# Altium PCB wifi_car.PcbDoc (part 1 of 5)
Units mm, origin at the board's own origin, x right, y up, seen from the top; angles counter-clockwise.
Board outline 68.55 x 80.89 mm, 2 copper layers (Top Layer, Bottom Layer); 133 components, 98 nets, 473 pads, 106 vias.
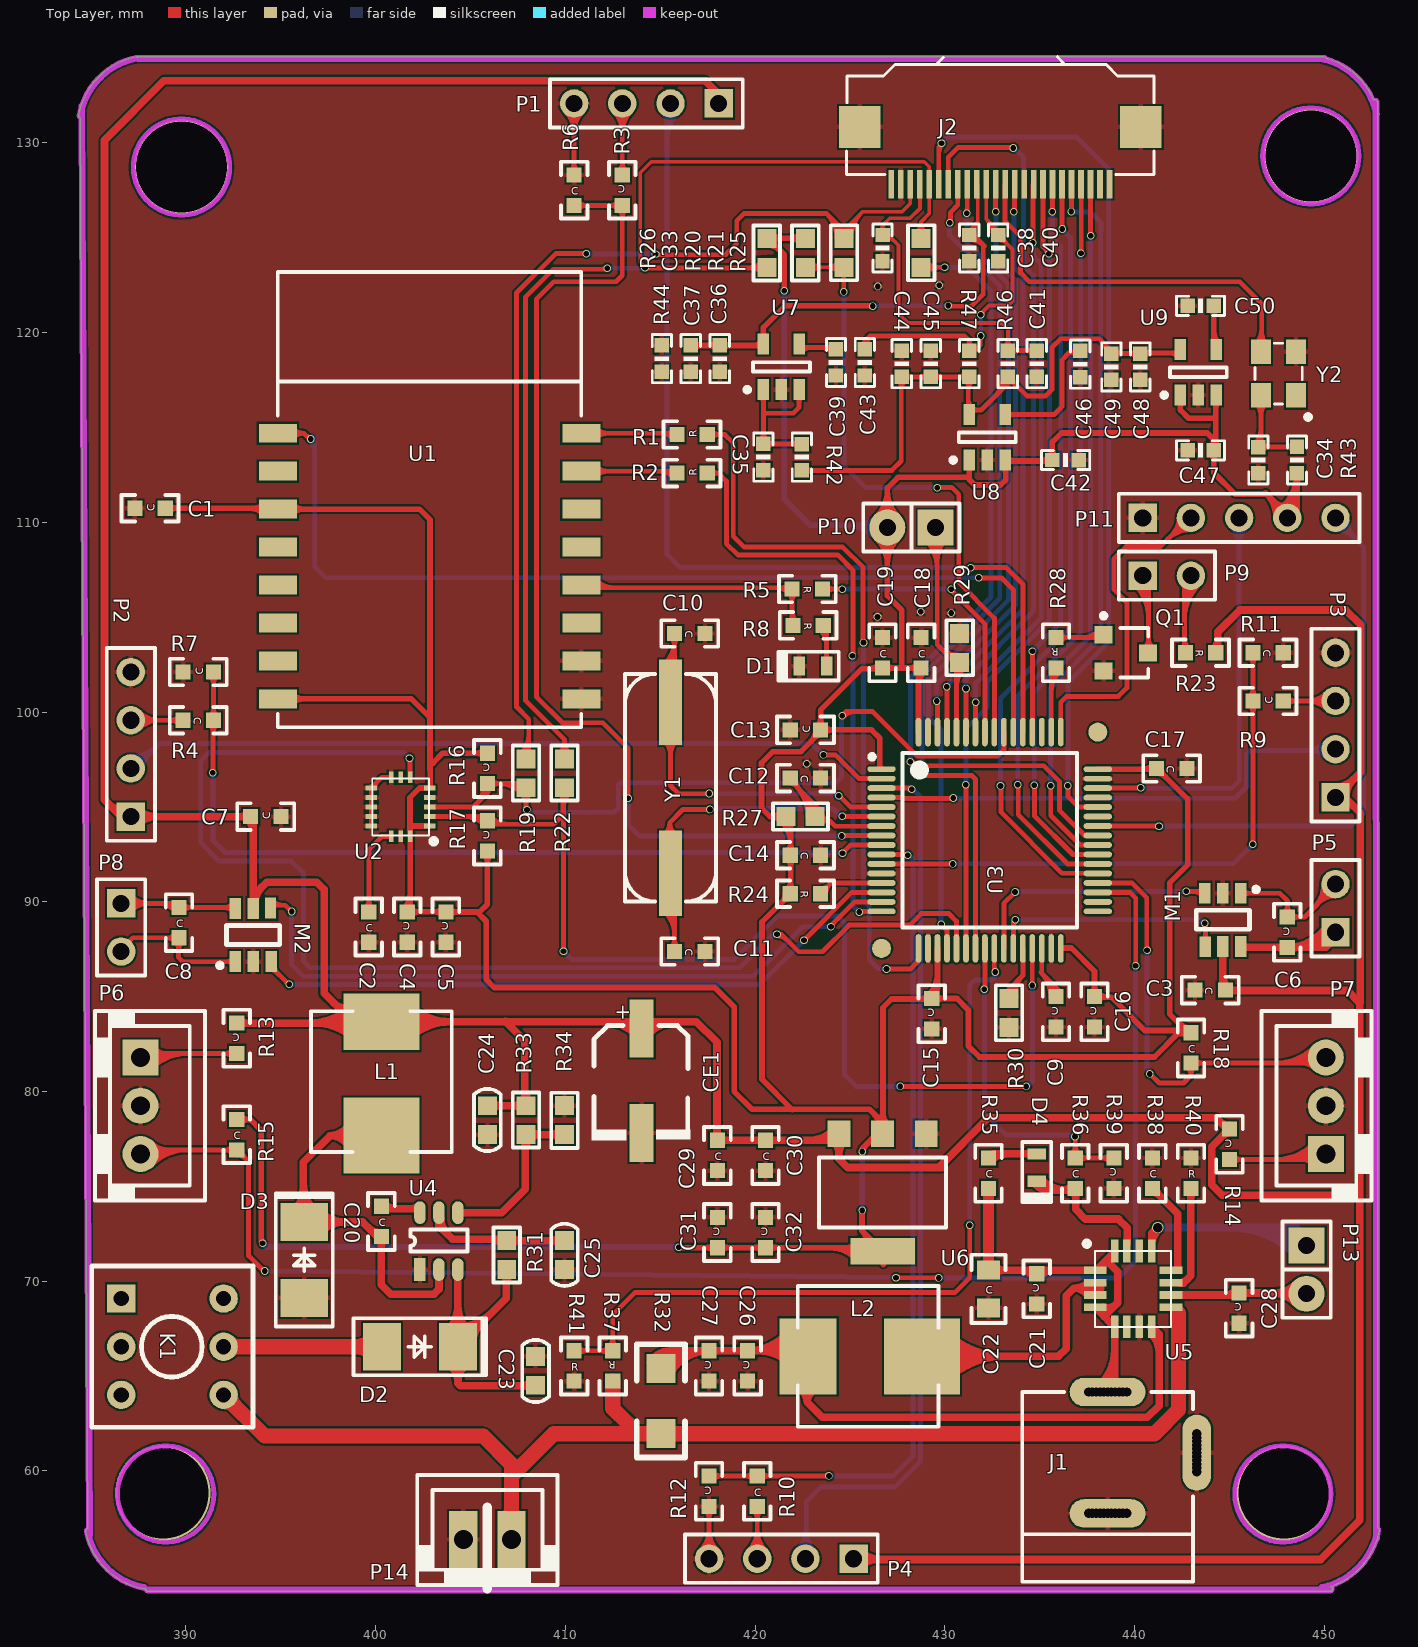
[diagram p0: Top Layer view]
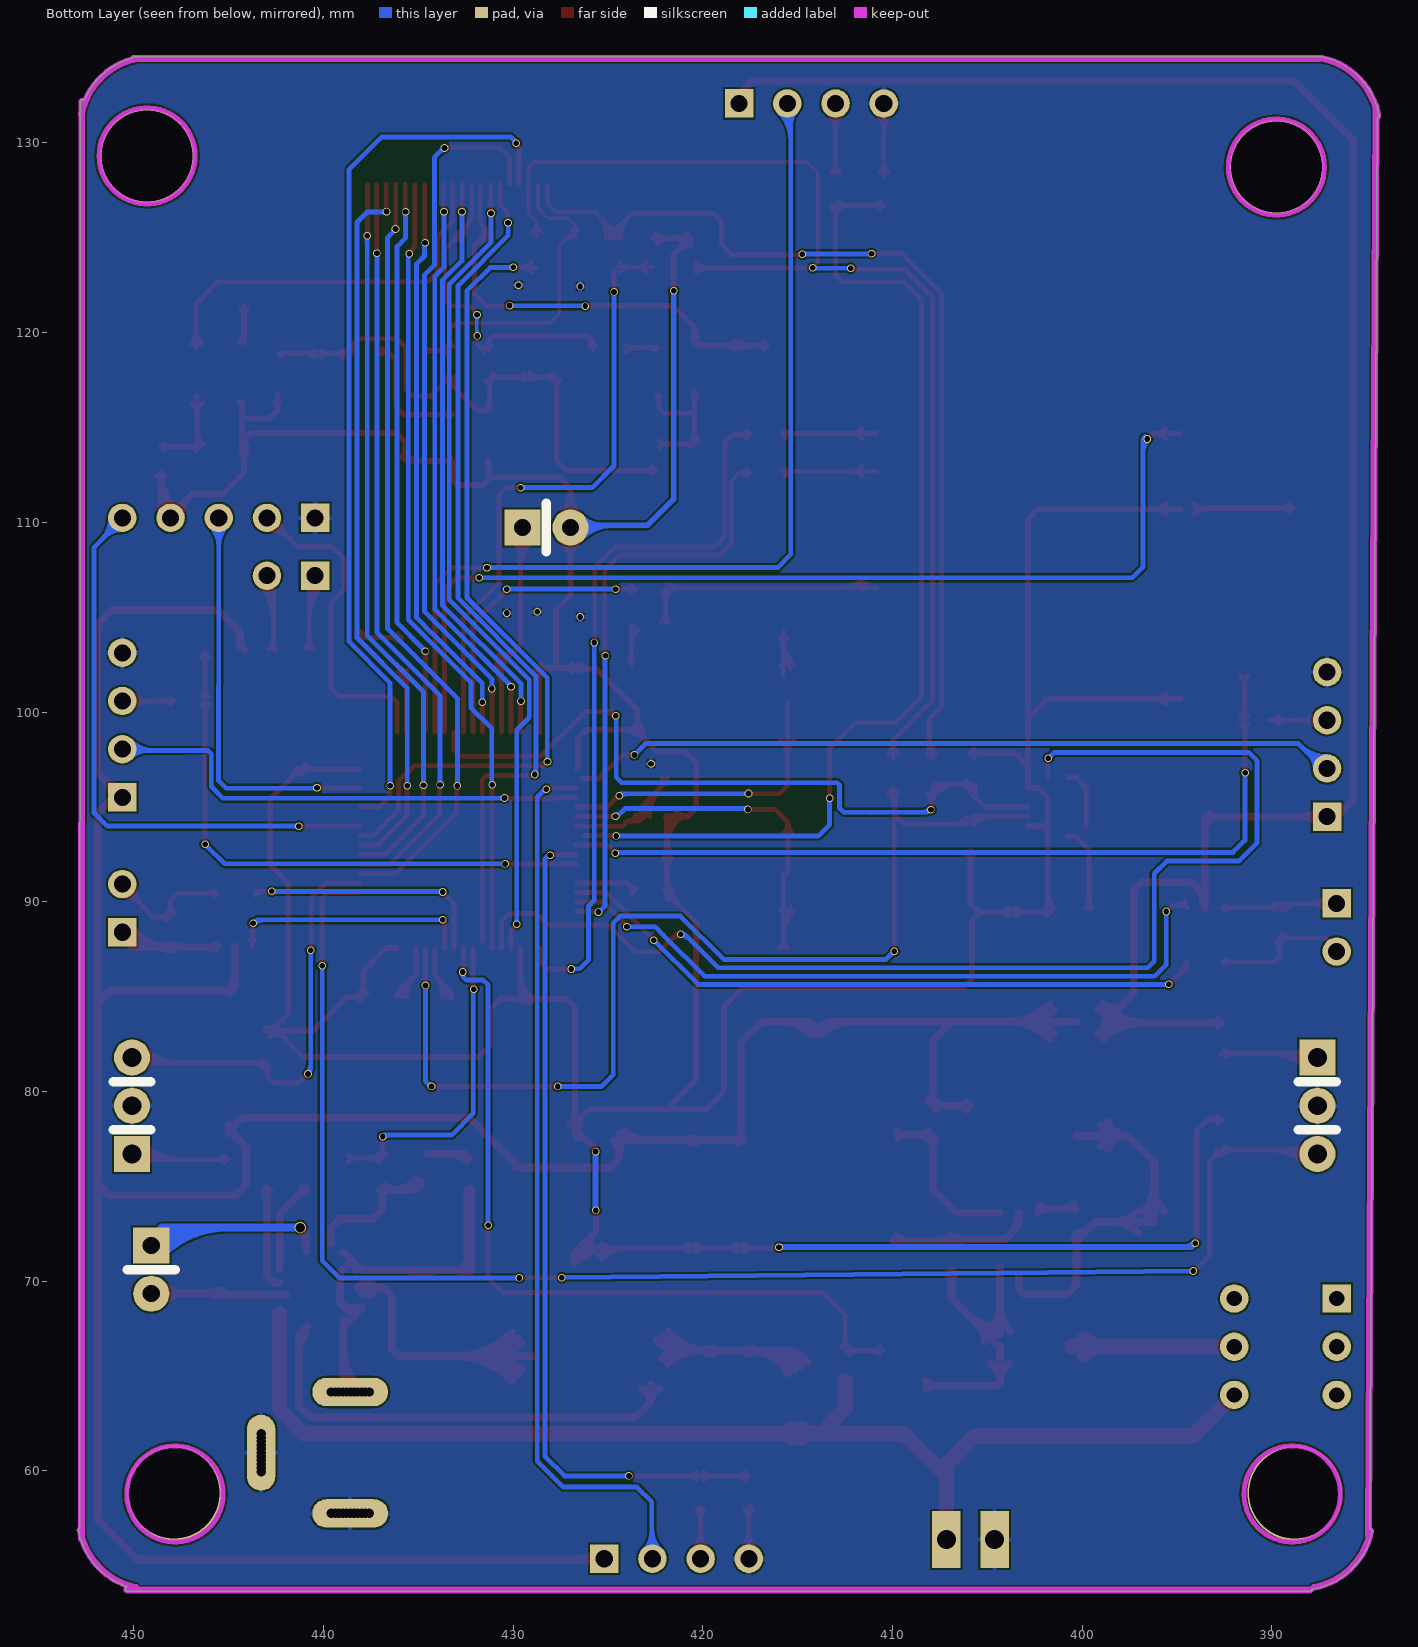
[diagram p1: Bottom Layer view, seen from below]

## Layer stack, top to bottom
Top Layer: signal copper 0.0356
Dielectric: dielectric 0.32, FR-4, Dk 4.8
Bottom Layer: signal copper 0.0356

## Board outline
384.839,56.947 384.442,131.312 cw(c384.474,131.435) 384.349,131.458 cw(c388.115,130.784) 384.439,131.845 384.439,131.909 cw(c384.566,131.91) 384.492,132.014 cw(c388.115,130.784) 387.365,134.536 cw(c387.39,134.411) 387.443,134.526 cw(c387.48,134.405) 387.48,134.532 449.674,134.532 cw(c449.73,134.418) 449.752,134.543 cw(c449.079,130.777) 449.811,134.532 449.988,134.532 cw(c449.988,134.405) 450.101,134.464 cw(c449.079,130.777) 452.61,132.249 cw(c452.684,132.145) 452.811,132.145 452.811,131.618 cw(c449.079,130.777) 452.83,131.527 cw(c452.705,131.502) 452.833,131.502 cw(c452.705,131.502) 452.811,131.431 452.829,56.994 cw(c452.772,56.88) 452.899,56.88 cw(c452.772,56.88) 452.897,56.858 cw(c449.131,57.531) 452.829,56.551 452.829,56.448 cw(c452.702,56.448) 452.766,56.338 cw(c449.131,57.531) 450.348,53.904 cw(c450.318,53.78) 450.446,53.78 cw(c450.318,53.78) 450.318,53.653 388.003,53.653 cw(c388.003,53.78) 387.875,53.786 cw(c387.828,53.905) 387.805,53.779 cw(c388.479,57.545) 384.727,56.795 cw(c384.852,56.82)

## Design rules (kind name [scope] priority, off if disabled: settings)
Clearance [All] p1: gap=0.1
PolygonConnect [All] p1: connectstyle=Relief reliefconductorwidth=0.254 reliefentries=4 polygonreliefangle="90 Angle"
RoutingVias [All] p1: holewidth=0.711 width=1.27 viastyle="Through Hole" minholewidth=0.2 minwidth=0.1 maxholewidth=0.711 maxwidth=2
SilkToSilkClearance [All] p1: silktosilkclearance=0.1
SilkscreenOverComponentPads [All] p1: minsilkscreentomaskgap=0.254
SolderMaskExpansion [All] p1: expansion=0.102
Width [All] p1: maxlimit=1 minlimit=0.1 preferedwidth=0.254 minimp=50.000000 maximp=50.000000 favimp=50.000000
26 further rules are at their usual default settings.

## Classes and differential pairs
component class power: C20 C21 C22 C23 C24 C25 C26 C27 C28 C29 C30 C31 C32 C33 C34 C35 C36 C37 C38 C39 C40 C41 C42 C43 C44 C45 C46 C47 C48 C49 C50 CE1 D2 D3 D4 J1 J2 K1 L1 L2 P13 P14 R31 R32 R33 R34 R35 R36 R37 R38 R39 R40 R41 R42 R43 R44 R46 R47 U4 U5 U6 U7 U8 U9 Y2
component class wifi_car_mcu: C9 C10 C11 C12 C13 C14 C15 C16 C17 C18 C19 P9 P10 P11 Q1 R19 R20 R21 R22 R23 R24 R25 R26 R27 R28 R29 R30 U3 Y1
component class peripheral: C1 C2 C3 C4 C5 C6 C7 C8 D1 L3 M1 M2 P1 P2 P3 P4 P5 P6 P7 P8 R1 R2 R3 R4 R5 R6 R7 R8 R9 R10 R11 R12 R13 R14 R15 R16 R17 R18 U1 U2

## Components (designator, comment, footprint, x,y, rotation, side; value= is the part's Value field where it differs from the comment)
C1 "104" 0603C 388.112,110.744 r0 top
C2 "0.47uF" 0603C 399.639,88.667 r270 top
C3 "104" 0603C 443.992,85.344 r180 top
C4 "2.2uF" 0603C 401.671,88.667 r90 top
C5 "0.1uF" 0603C 403.703,88.667 r90 top
C6 "104" 0603C 448.056,88.392 r90 top
C7 "104" 0603C 394.208,94.488 r0 top
C8 "104" 0603C 389.636,88.9 r270 top
C9 "2.2pF" 0603C 435.864,84.199 r90 top
C10 "22pF" 0603C 416.56,104.14 r180 top
C11 "22pF" 0603C 416.56,87.376 r180 top
C12 "104" 0603C 422.656,96.52 r180 top
C13 "104" 0603C 422.656,99.06 r0 top
C14 "104" 0603C 422.656,92.456 r180 top
C15 "104" 0603C 429.318,84.099 r90 top
C16 "104" 0603C 437.896,84.199 r90 top
C17 "104" 0603C 441.96,97.028 r180 top
C18 "104" 0603C 428.752,103.124 r270 top
C19 "104" 0603C 426.72,103.124 r270 top
C20 "1uF" 0603c 400.304,73.152 r270 top
C21 "0.1uF" 0603C 434.848,69.596 r90 top
C22 "10uF" 0805C 432.308,69.596 r270 top
C23 "0.1uF" C0603 408.432,64.516 r90 top
C24 "0.1uF" C0603 405.892,79.248 r270 top
C25 "0.1uF" C0603 409.956,72.136 r270 top
C26 "10uF" 0603C 419.608,65.532 r90 top
C27 "0.1uF" 0603C 417.576,65.532 r90 top
C28 "0.1uF" 0603C 445.516,68.58 r90 top
C29 "Cap" 0603C 418.014,76.628 r270 top
C30 "Cap" 0603C 420.554,76.628 r270 top
C31 "Cap" 0603C 418.014,72.564 r90 top
C32 "Cap" 0603C 420.554,72.564 r90 top
C33 "104" 0603P 426.72,124.46 r270 top
C34 "104" 0603P 446.532,113.284 r270 top
C35 "105" 0603P 420.44,113.437 r90 top
C36 "106" 0603P 418.134,118.626 r90 top
C37 "104" 0603P 416.61,118.626 r90 top
C38 "104" 0603P 431.292,124.46 r270 top
C39 "22nF" 0603P 424.264,118.425 r90 top
C40 "104" 0603P 432.816,124.46 r270 top
C41 "105" 0603P 434.848,118.364 r270 top
C42 "105" 0603P 436.372,113.284 r180 top
C43 "105" 0603P 425.788,118.425 r90 top
C44 "106" 0603P 427.736,118.364 r270 top
C45 "104" 0603P 429.26,118.364 r270 top
C46 "22nF" 0603P 437.135,118.337 r90 top
C47 "105" 0603P 443.484,113.792 r0 top
C48 "106" 0603P 440.306,118.194 r90 top
C49 "104" 0603P 438.782,118.194 r90 top
C50 "22nF" 0603P 443.484,121.412 r0 top
CE1 "100u/10V" C_195 414.02,83.312 r90 top
D1 "LED0" 0603LED 423.772,102.42 r180 top
D2 "1N4007" DO-214AC 402.336,66.548 r0 top
D3 "1N5819" DO-214AC 396.24,71.12 r90 top
D4 "LED0" 0603LED 434.848,76.708 r270 top
J1 "DC" dc5V 440.436,60.96 r90 top
J2 "OV2640" OV2640 427.182,128.076 r0 top
K1 "BUTTON" BTN8.5*8.5 386.588,69.088 r0 top
L1 "6.8uH" WE_PD 400.304,77.216 r270 top
L2 "22uH/2A" WE_PD 429.26,66.04 r0 top
M1 "MX116L" MX116L 443.992,87.376 r90 top
M2 "MX116L" MX116L 394.208,89.916 r270 top
P1 "HC-SR04" HDR1X4 418.084,132.08 r180 top
P2 "HC-SR04" HDR1X4 387.096,94.488 r90 top
P3 "HC-SR04" HDR1X4 450.596,95.504 r90 top
P4 "HC-SR04" HDR1X4 425.196,55.372 r180 top
P5 "Header 2" HDR1X2 450.596,88.392 r90 top
P6 "Header 3" CON3 387.604,79.248 r270 top
P7 "Header 3" CON3 450.088,79.248 r90 top
P8 "Header 2" HDR1X2 386.588,89.916 r270 top
P9 "LED" HDR1X2 440.436,107.188 r0 top
P10 "开关" SIP2 428.244,109.728 r180 top
P11 "SWD" HDR1X5 440.436,110.236 r0 top
P13 "LED" SIP2 449.072,70.612 r270 top
P14 "BAT" CON2 405.892,56.388 r0 top
Q1 "S8050" SOT-23 439.42,103.124 r270 top
R1 "0R" 0603R 416.679,114.627 r0 top
R2 "0R" 0603R 416.679,112.595 r0 top
R3 "1K" 0603C 413.004,127.508 r90 top
R4 "1K" 0603C 390.652,99.568 r180 top
R5 "33R" 0603R 422.756,106.484 r180 top
R6 "2K" 0603C 410.464,127.508 r270 top
R7 "2K" 0603C 390.652,102.108 r0 top
R8 "2.7K" 0603R 422.798,104.567 r180 top
R9 "1K" 0603C 447.04,100.584 r0 top
R10 "1K" 0603C 420.116,58.928 r270 top
R11 "2K" 0603C 447.04,103.124 r180 top
R12 "2K" 0603C 417.576,58.928 r90 top
R13 "1K" 0603C 392.684,82.804 r90 top
R14 "1K" 0603C 445.008,77.216 r90 top
R15 "1K" 0603C 392.684,77.724 r270 top
R16 "4.7K" 0603C 405.892,97.028 r90 top
R17 "4.7K" 0603C 405.892,93.472 r90 top
R18 "1K" 0603C 442.976,82.296 r270 top
R19 "0R" R0603 407.924,97.536 r270 top
R20 "0R" R0603 424.688,124.968 r270 top
R21 "4.7k" R0603 422.656,123.444 r90 top
R22 "0R" R0603 409.956,97.536 r270 top
R23 "1K" 0603R 443.484,103.124 r180 top
R24 "0R" 0603R 422.656,90.424 r180 top
R25 "4.7k" R0603 420.624,123.444 r90 top
R26 "0R" R0603 428.752,124.968 r270 top
R27 "10K" R0603 421.64,94.488 r0 top
R28 "4.7K" 0603R 435.864,103.124 r90 top
R29 "10K" R0603 430.784,104.14 r270 top
R30 "10K" R0603 433.382,84.903 r270 top
R31 "10K" R0603 406.908,72.136 r270 top
R32 "0.067R" 1206 415.036,61.976 r90 top
R33 "40.2K/1%" R0603 407.924,79.248 r270 top
R34 "7.68K/1%" R0603 409.956,77.724 r90 top
R35 "10K" 0603C 432.308,75.692 r270 top
R36 "10K" 0603C 436.88,75.692 r270 top
R37 "40K" 0603R 412.496,65.532 r90 top
R38 "0R" 0603C 440.944,75.692 r270 top
R39 "20K" 0603C 438.912,75.692 r90 top
R40 "0R" 0603R 442.976,75.692 r270 top
R41 "10K" 0603R 410.464,65.532 r270 top
R42 "0R" 0603P 422.472,113.437 r270 top
R43 "0R" 0603P 448.564,113.284 r90 top
R44 "0R" 0603P 415.086,118.626 r90 top
R46 "0R" 0603P 433.324,118.364 r270 top
R47 "0R" 0603P 431.292,118.364 r270 top
U1 "E103-W01" E103-W01 402.844,107.696 r0 top
U2 "ICM-20608-G" IC268G 401.32,94.996 r180 top
U3 "STM32F446RC" LQFP64_10X10P 432.366,93.243 r0 top locked
U4 "BL8032" SOT23-6 402.336,70.612 r90 top
U5 "TP5100" QFN16(4*4) 439.928,69.596 r0 top
U6 "1117-3.3V" SOT223 426.72,74.676 r180 top
U7 "TPS76315DBVR" TPS763 420.44,116.993 r0 top
U8 "TPS76328DBVR" TPS763 431.292,113.284 r0 top
U9 "TPS76328DBVR" TPS763 442.418,116.71 r0 top
Y1 "8M" XTAL1 415.544,96.012 r90 top
Y2 "24M" XTAL_S 448.514,116.71 r90 top

## Footprints (in the part's own frame and the unit in brackets; to place one, negate y for a bottom-side part, rotate by r counter-clockwise, add the part's x,y. Pads: shape width x height; smd on the part's side, far side on the other; paste and mask are expansions set on the pad)
0603C [mm]
  rect 0.8x0.8 smd: 1(-0.8,0) 2(0.8,0)
  silkscreen extent -1.5,-0.7 1.5,0.7
0603c [mm]
  rect 0.8x0.8 smd: 1(-0.8,0) 2(0.8,0)
  silkscreen extent -1.5,-0.7 1.5,0.7
0603LED [mm]
  rect 0.6x1 smd: 1(0,0) 2(1.44,0)
  silkscreen extent -0.64,-0.76 2.54,0.76
0603P [mil]
  rect 30x30 smd: 1(-27,0) 2(27.5,-0.06)
  silkscreen extent -50,-20 50,20
0603R [mm]
  rect 0.8x0.8 smd: 1(-0.8,0) 2(0.8,0)
  silkscreen extent -1.5,-0.7 1.5,0.7
0805C [mm]
  rect 1x1.2 smd: 1(-1,0) 2(1,0)
  silkscreen extent -1.8,-0.9 1.8,0.9
1206 [mil]
  rect 60x60 smd: 1(0,0) 2(135,0)
  silkscreen extent -50,-50 185,50
BTN8.5*8.5 [mm]
  rect 1.5x1.5 hole 0.8: 1(0,0)
  round 1.5 hole 0.8: 2(0,-2.54) 3(0,-5.08) 4(5.4,-5.08) 5(5.4,-2.54) 6(5.4,0)
  silkscreen extent -1.55,-6.79 6.95,1.71
C0603 [mm]
  rect 1x1 smd: 1(0,0.003) 2(1.525,0.003)
  silkscreen extent -0.89,-0.7 2.39,0.7
C_195 [mil]
  rect 120x50 smd: 1(0,0) 2(-216.54,0)
  silkscreen extent -232,-101 6,104
CON2 [mm]
  rect 1.5x3 hole 1: 1(-1.27,0) 2(1.27,0)
  silkscreen extent -3.7,-2.59 3.7,3.4
CON3 [mm]
  rect 1.9x1.9 hole 1: 1(-2.54,0)
  round 1.9 hole 1: 2(0,0) 3(2.54,0)
  silkscreen extent -5,-2.4 5,3.4
dc5V [mm]
  round 0.4 hole 0.5: 1(3.2,0.85) 1(3.2,1.05) 1(3.2,1.25) 1(3.2,1.45) 1(3.2,1.65) 1(3.2,1.85) 1(3.2,2.05) 1(3.2,2.25) 1(3.2,2.45) 1(3.2,2.65) 1(3.2,2.85) 2(-3.2,0.85) 2(-3.2,1.05) 2(-3.2,1.25) 2(-3.2,1.45) 2(-3.2,1.65) 2(-3.2,1.85) 2(-3.2,2.05) 2(-3.2,2.25) 2(-3.2,2.45) 2(-3.2,2.65) 2(-3.2,2.85) 3(-1,-2.85) 3(-0.8,-2.85) 3(-0.6,-2.85) 3(-0.4,-2.85) 3(-0.2,-2.85) 3(0,-2.85) 3(0.2,-2.85) 3(0.4,-2.85) 3(0.6,-2.85) 3(0.8,-2.85) 3(1,-2.85)
  oval 1.5x4 hole 0.5: 1(3.2,1.85) 2(-3.2,1.85)
  oval 4x1.5 hole 0.5: 3(0,-2.85)
  silkscreen extent -6.8,-2.65 3.2,6.35
DO-214AC [mm]
  rect 2x2.5 smd: 1(-2,0) 2(2,0)
  silkscreen extent -3.5,-1.5 3.5,1.5
E103-W01 [mm]
  rect 2x1 smd: 1(-8,7) 2(-8,5) 3(-8,3) 4(-8,1) 5(-8,-1) 6(-8,-3) 7(-8,-5) 8(-8,-7) 9(8,-7) 10(8,-5) 11(8,-3) 12(8,-1) 13(8,1) 14(8,3) 15(8,5) 16(8,7)
  silkscreen extent -8,-8.5 8,15.5
HDR1X2 [mm] "Connector; Header; 2 Position"
  rect 1.5x1.5 hole 0.9: 1(0,0)
  round 1.5 hole 0.9: 2(2.54,0)
  silkscreen extent -1.27,-1.27 3.81,1.27
HDR1X4 [mm]
  rect 1.5x1.5 hole 0.9: 1(0,0)
  round 1.5 hole 0.9: 2(2.54,0) 3(5.08,0) 4(7.62,0)
  silkscreen extent -1.27,-1.27 8.89,1.27
HDR1X5 [mm]
  rect 1.5x1.5 hole 0.9: 1(0,0)
  round 1.5 hole 0.9: 2(2.54,0) 3(5.08,0) 4(7.62,0) 5(10.16,0)
  silkscreen extent -1.27,-1.27 11.43,1.27
IC268G [mm]
  rect 0.6x0.25 smd: 1(-1.525,1) 2(-1.525,0.5) 3(-1.525,0) 4(-1.525,-0.5) 5(-1.525,-1) 9(1.555,-1) 10(1.555,-0.5) 11(1.555,0) 12(1.555,0.5) 13(1.555,1)
  rect 0.25x0.6 smd: 6(-0.5,-1.56) 7(0,-1.56) 8(0.5,-1.56) 14(0.5,1.55) 15(0,1.55) 16(-0.5,1.55)
  silkscreen extent -1.89,-1.5 1.5,1.96
LQFP64_10X10P [mm]
  oval 1.5x0.3 smd: 1(-5.7,3.75) 2(-5.7,3.25) 3(-5.7,2.75) 4(-5.7,2.25) 5(-5.7,1.75) 6(-5.7,1.25) 7(-5.7,0.75) 8(-5.7,0.25) 9(-5.7,-0.25) 10(-5.7,-0.75) 11(-5.7,-1.25) 12(-5.7,-1.75) 13(-5.7,-2.25) 14(-5.7,-2.75) 15(-5.7,-3.25) 16(-5.7,-3.75) 33(5.7,-3.75) 34(5.7,-3.25) 35(5.7,-2.75) 36(5.7,-2.25) 37(5.7,-1.75) 38(5.7,-1.25) 39(5.7,-0.75) 40(5.7,-0.25) 41(5.7,0.25) 42(5.7,0.75) 43(5.7,1.25) 44(5.7,1.75) 45(5.7,2.25) 46(5.7,2.75) 47(5.7,3.25) 48(5.7,3.75)
  oval 0.3x1.5 smd: 17(-3.75,-5.7) 18(-3.25,-5.7) 19(-2.75,-5.7) 20(-2.25,-5.7) 21(-1.75,-5.7) 22(-1.25,-5.7) 23(-0.75,-5.7) 24(-0.25,-5.7) 25(0.25,-5.7) 26(0.75,-5.7) 27(1.25,-5.7) 28(1.75,-5.7) 29(2.25,-5.7) 30(2.75,-5.7) 31(3.25,-5.7) 32(3.75,-5.7) 49(3.75,5.7) 50(3.25,5.7) 51(2.75,5.7) 52(2.25,5.7) 53(1.75,5.7) 54(1.25,5.7) 55(0.75,5.7) 56(0.25,5.7) 57(-0.25,5.7) 58(-0.75,5.7) 59(-1.25,5.7) 60(-1.75,5.7) 61(-2.25,5.7) 62(-2.75,5.7) 63(-3.25,5.7) 64(-3.75,5.7)
  round 1 smd: 65(-5.7,-5.7) 66(5.7,5.7)
  silkscreen extent -6.32,-4.6 4.6,4.6
MX116L [mm]
  rect 1.1x0.6 smd: 1(3.073,-1.614) 2(3.073,-0.664) 3(3.073,0.286) 4(0.254,0.254) 5(0.273,-0.664) 6(0.273,-1.614)
  silkscreen extent 1.17,-2.54 3.4,0.74
OV2640 [mm]
  rect 0.3x1.5 smd: 1(0,-0.254) 2(0.5,-0.254) 3(1,-0.254) 4(1.5,-0.254) 5(2,-0.254) 6(2.5,-0.254) 7(3,-0.254) 8(3.5,-0.254) 9(4,-0.254) 10(4.5,-0.254) 11(5,-0.254) 12(5.5,-0.254) 13(6,-0.254) 14(6.5,-0.254) 15(7,-0.254) 16(7.5,-0.254) 17(8,-0.254) 18(8.5,-0.254) 19(9,-0.254) 20(9.5,-0.254) 21(10,-0.254) 22(10.5,-0.254) 23(11,-0.254) 24(11.5,-0.254)
  rect 2.2x2.2 smd: 25(13.151,2.769) 26(-1.657,2.769)
  silkscreen extent -2.36,0.25 13.85,6.47
QFN16(4*4) [mm]
  rect 1.2x0.4 smd: 1(-2,0.975) 2(-2,0.325) 3(-2,-0.325) 4(-2,-0.975) 9(2,-0.975) 10(2,-0.325) 11(2,0.325) 12(2,0.975)
  rect 0.4x1.2 smd: 5(-0.975,-2) 6(-0.325,-2) 7(0.325,-2) 8(0.975,-2) 13(0.975,2) 14(0.325,2) 15(-0.325,2) 16(-0.975,2)
  silkscreen extent -2.58,-2 2,2.52
R0603 [mm]
  rect 1x1 smd: 1(0,0.003) 2(1.525,0.003)
  silkscreen extent -0.7,-0.7 2.2,0.7
SIP2 [mm]
  rect 1.9x1.9 hole 0.9: 1(-1.27,0)
  round 1.9 hole 0.9: 2(1.27,0)
  silkscreen extent -2.54,-1.27 2.54,1.27
SOT23-6 [mm]
  rect 1.2x0.6 smd: 1(0,0)
  oval 1.2x0.6 smd: 2(0,-1) 3(0,-2) 4(3,-2) 5(3,-1) 6(3,0)
  silkscreen extent 0.95,-2.5 2.12,0.5
SOT223 [mm]
  rect 1.2x1.4 smd: 1(-2.3,-3.1) 2(0,-3.1) 3(2.3,-3.1)
  rect 3.4x1.4 smd: 4(0,3.1)
  silkscreen extent -3.35,-1.85 3.35,1.85
SOT-23 [mm]
  rect 0.9x0.95 smd: 1(-0.95,-1.048) 2(0.95,-1.048) 3(0,1.302)
  silkscreen extent -2.07,-1.17 1.3,1.3
TPS763 [mm]
  rect 0.6x1.1 smd: 1(0,0) 2(0.95,0) 3(1.9,0) 4(1.9,2.4) 5(0,2.4)
  silkscreen extent -0.97,-0.12 2.45,1.45, body extent -0.55,0.35 2.45,2.05, height 1.45
WE_PD [mm]
  rect 4x4 smd: 1(-0.459,0)
  rect 3x4 smd: 2(-6.459,0)
  silkscreen extent -7.01,-3.71 0.41,3.71
XTAL1 [mm]
  rect 4.5x1.2 smd: 1(-4.5,0) 2(4.5,0)
  silkscreen extent -6,-2.4 6,2.4
XTAL_S [mm]
  rect 1.3x1.05 smd: 1(-0.014,0) 2(2.286,0) 3(2.286,1.85) 4(-0.014,1.85)
  silkscreen extent -1.28,-0.76 2.73,2.17

## Part data
C1 C2 C3 C4 C5 C6 C7 C8 C12 C13 C14 C15 C16 C17 C18 C19: library part Cap_1, "Capacitor"
C9 C10 C11 C22: library part Cap, "Capacitor"
C20 C21 C23 C24 C25 C26 C27 C28 C30: library part CAP, "Capacitor"
C29 C31 C32 U5: "Capacitor"
C33 C34 C35 C36 C37 C38 C39 C40 C41 C42 C43 C44 C45 C46 C47 C48 C49 C50: library part C
CE1: library part CE
D1 D4: "Typical INFRARED GaAs LED"
D2 D3: library part D, "Diode"
J1: library part POWERCON
L1 L2: library part INDUCTOR
P1 P2 P3 P4: library part "Header 4", "Header, 4-Pin"
P5 P8: library part "Header 2_2", "Header, 2-Pin"
P6 P7: "Header, 3-Pin"
P9 P13 P14: library part "Header 2", "Header, 2-Pin"
P10: library part "Header 2_1", "Header, 2-Pin"
P11: library part "Header 5", "Header, 5-Pin"
Q1: library part NPN_1
R1 R2 R23 R24 R28: library part Res1_4, "Resistor"
R3 R4 R6 R7 R9 R10 R11 R12 R13 R14 R15 R16 R18 R32 R35 R36 R38 R39 R40: library part Res1, "Resistor"
R5 R8: library part RES1
R17 R37 R41: library part res1, "Resistor"
R19 R20 R21 R22 R25 R26 R27 R29 R30: library part R_1, "Resistor"
R31 R33 R34: library part R, "Resistor"
R42 R43 R44 R46 R47: library part R
U1: "Diode"
U2: library part DS-000081, "Capacitor"
U4: "Diode Bridge"
U6: library part 1117, "LDO"
U7: library part "TPS763  SOT23-5"
U8 U9: library part "TPS763  SOT23-5", "TPS76315DBVR"
Y1: library part XTAL, "Crystal Oscillator"
Y2: library part XTAL_S

## Via types
v1: diameter 0.4, hole 0.3, Top Layer to Bottom Layer, 101 vias
v2: diameter 5, hole 4.8, Top Layer to Bottom Layer, 4 vias
v3: diameter 0.6, hole 0.5, Top Layer to Bottom Layer, 1 vias

## Nets (pads, with @x,y where several pads share a name; then routed paths per layer and width w, separated by ;. In a path a pad name is that pad's centre, name@x,y a point inside that pad or via, vN(x,y) a via of type N, cw(c..) or ccw(c..) an arc to the next point about the centre after c; other vN are vias at no path point)
12V: C21.2 C22.1 J1.1 R35.2 U5.1 U5.4 U5.5 U5.16 | length 52.9
  Top Layer w0.4: C22.1@432.646,70.571 U5.1@437.851,70.571 ; U5.4@437.928,68.621 438.408,68.141 ; U5.1@437.928,70.571 437.979,70.571 438.516,71.108 ; J1.1@438.771,64.137 J1.1@438.953,64.319 ; U5.5@438.953,67.596 J1.1@438.953,64.319 ; U5.16@438.97,71.499 438.908,71.499 438.516,71.108 ; C22.1@432.62,70.384 cw(c433.072,69.932) 433.072,70.571 ; C22.1@432.62,70.384 cw(c433.072,69.932) 433.072,70.571 ; C22.1@432.62,70.384 cw(c433.072,69.932) 433.072,70.571 ; C22.1@432.62,70.808 ccw(c433.193,71.381) 433.193,70.571 ; C22.1@432.62,70.808 ccw(c433.193,71.381) 433.193,70.571 ; C22.1@432.62,70.808 ccw(c433.193,71.381) 433.193,70.571 ; 433.943,70.571 cw(c433.943,69.491) C21.2@434.707,70.255 ; 433.943,70.571 cw(c433.943,69.491) C21.2@434.707,70.255 ; 433.943,70.571 cw(c433.943,69.491) C21.2@434.707,70.255 ; C21.2@434.989,70.255 cw(c435.753,69.491) 435.753,70.571 ; C21.2@434.989,70.255 cw(c435.753,69.491) 435.753,70.571 ; C21.2@434.989,70.255 cw(c435.753,69.491) 435.753,70.571 ; J1.1@438.197,64.549 ccw(c436.372,66.374) 438.953,66.374 ; J1.1@438.197,64.549 ccw(c436.372,66.374) 438.953,66.374 ; J1.1@438.197,64.549 ccw(c436.372,66.374) 438.953,66.374 ; U5.4@438.328,68.621 ccw(c438.511,69.465) 439.121,68.854 ; U5.4@438.328,68.621 ccw(c438.511,69.465) 439.121,68.854 ; U5.4@438.328,68.621 ccw(c438.511,69.465) 439.121,68.854 ; U5.1@438.328,70.571 cw(c438.979,70.644) 438.516,71.108 ; U5.1@438.328,70.571 cw(c438.979,70.644) 438.516,71.108 ; U5.1@438.328,70.571 cw(c438.979,70.644) 438.516,71.108 ; J1.1@438.386,64.16 ccw(c438.528,64.743) J1.1@438.953,64.319 ; J1.1@438.386,64.16 ccw(c438.528,64.743) J1.1@438.953,64.319 ; J1.1@438.386,64.16 ccw(c438.528,64.743) J1.1@438.953,64.319 ; 438.408,68.141 439.121,68.854 ; 438.408,68.141 438.73,67.819 ; J1.1@438.48,64.266 ccw(c437.338,65.408) 438.953,65.408 ; J1.1@438.48,64.266 ccw(c437.338,65.408) 438.953,65.408 ; J1.1@438.48,64.266 ccw(c437.338,65.408) 438.953,65.408 ; 438.516,71.108 439.121,70.502 439.121,68.854 ; J1.1@438.586,64.16 ccw(c438.586,64.663) J1.1@438.942,64.307 ; J1.1@438.586,64.16 ccw(c437.7,65.046) 438.953,65.046 ; J1.1@438.586,64.16 ccw(c438.586,64.663) J1.1@438.942,64.307 ; J1.1@438.586,64.16 ccw(c437.7,65.046) 438.953,65.046 ; J1.1@438.586,64.16 ccw(c438.586,64.663) J1.1@438.942,64.307 ; J1.1@438.586,64.16 ccw(c437.7,65.046) 438.953,65.046 ; 438.73,67.819 ccw(c438.73,68.048) U5.5@438.953,67.996 ; 438.73,67.819 ccw(c438.73,68.048) U5.5@438.953,67.996 ; 438.73,67.819 ccw(c438.73,68.048) U5.5@438.953,67.996 ; 438.73,67.819 438.749,67.819 ; 438.749,67.819 ccw(c438.749,68.025) U5.5@438.953,67.996 ; 438.749,67.819 ccw(c438.749,68.025) U5.5@438.953,67.996 ; 438.749,67.819 ccw(c438.749,68.025) U5.5@438.953,67.996 ; J1.1@438.786,64.16 ccw(c438.383,64.563) J1.1@438.953,64.563 ; J1.1@438.786,64.16 ccw(c438.383,64.563) J1.1@438.953,64.563 ; J1.1@438.786,64.16 ccw(c438.383,64.563) J1.1@438.953,64.563 ; J1.1@438.953,64.723 ccw(c439.749,64.723) J1.1@439.186,64.16 ; J1.1@438.953,64.723 ccw(c439.749,64.723) J1.1@439.186,64.16 ; J1.1@438.953,64.723 ccw(c439.749,64.723) J1.1@439.186,64.16
  Top Layer w0.6: C22.1@432.249,70.634 432.308,70.693 R35.2@432.308,74.805 ; C22.1@432.586,70.631 C22.1@432.646,70.571
AVDD_2V8: C33.1 C41.1 J2.4 R46.1 | length 30
  Top Layer w0.2: C33.1@426.72,125.146 427.023,125.146 427.566,124.603 427.566,120.999 428.063,120.501 433.016,120.501 433.332,120.186 R46.1@433.332,119.275 ; C33.1@426.724,125.318 426.724,125.659 ; J2.4@428.682,127.822 428.69,127.814 428.69,126.548 428.175,126.033 427.097,126.033 426.724,125.659 ; C33.1@426.571,125.384 ccw(c426.399,125.659) 426.724,125.659 ; C33.1@426.571,125.384 ccw(c426.399,125.659) 426.724,125.659 ; C33.1@426.571,125.384 ccw(c426.399,125.659) 426.724,125.659 ; C33.1@426.72,125.065 cw(c426.72,124.137) 427.376,124.793 ; C33.1@426.72,125.065 cw(c426.72,124.137) 427.376,124.793 ; C33.1@426.72,125.065 cw(c426.72,124.137) 427.376,124.793 ; 426.724,125.659 ccw(c427.057,125.659) C33.1@426.874,125.381 ; 426.724,125.659 ccw(c427.057,125.659) C33.1@426.874,125.381 ; 426.724,125.659 ccw(c427.057,125.659) C33.1@426.874,125.381 ; R46.1@433.125,119.249 ccw(c432.627,119.747) 433.332,119.747 ; R46.1@433.125,119.249 ccw(c432.627,119.747) 433.332,119.747 ; R46.1@433.125,119.249 ccw(c432.627,119.747) 433.332,119.747 ; 433.332,119.71 ccw(c433.984,119.71) R46.1@433.523,119.249 ; 433.332,119.71 ccw(c433.984,119.71) R46.1@433.523,119.249 ; 433.332,119.71 ccw(c433.984,119.71) R46.1@433.523,119.249
  Top Layer w0.254: R46.1@433.324,119.05 C41.1@434.586,119.05 ; R46.1@433.504,118.87 cw(c433.937,118.437) 433.937,119.05 ; R46.1@433.504,118.87 cw(c433.937,118.437) 433.937,119.05 ; R46.1@433.504,118.87 cw(c433.937,118.437) 433.937,119.05 ; R46.1@433.504,119.229 ccw(c433.937,119.663) 433.937,119.05 ; R46.1@433.504,119.229 ccw(c433.937,119.663) 433.937,119.05 ; R46.1@433.504,119.229 ccw(c433.937,119.663) 433.937,119.05 ; 434.235,119.05 ccw(c434.235,119.663) C41.1@434.668,119.229 ; 434.235,119.05 cw(c434.235,118.437) C41.1@434.668,118.87 ; 434.235,119.05 ccw(c434.235,119.663) C41.1@434.668,119.229 ; 434.235,119.05 cw(c434.235,118.437) C41.1@434.668,118.87 ; 434.235,119.05 ccw(c434.235,119.663) C41.1@434.668,119.229 ; 434.235,119.05 cw(c434.235,118.437) C41.1@434.668,118.87
BAT_8.4V: D2.1 K1.5 | length 19.4
  Top Layer w0.8: K1.5@391.988,66.548 400.523,66.548 D2.1@400.546,66.571 ; K1.5@392.236,66.301 cw(c392.833,65.703) 392.833,66.548 ; K1.5@392.236,66.301 cw(c392.833,65.703) 392.833,66.548 ; K1.5@392.236,66.301 cw(c392.833,65.703) 392.833,66.548 ; K1.5@392.236,66.796 ccw(c392.833,67.393) 392.833,66.548 ; K1.5@392.236,66.796 ccw(c392.833,67.393) 392.833,66.548 ; K1.5@392.236,66.796 ccw(c392.833,67.393) 392.833,66.548 ; 398.888,66.548 ccw(c398.888,67.996) D2.1@399.912,66.972 ; 398.887,66.548 cw(c398.887,65.099) D2.1@399.912,66.124 ; 398.888,66.548 ccw(c398.888,67.996) D2.1@399.912,66.972 ; 398.887,66.548 cw(c398.887,65.099) D2.1@399.912,66.124 ; 398.888,66.548 ccw(c398.888,67.996) D2.1@399.912,66.972 ; 398.887,66.548 cw(c398.887,65.099) D2.1@399.912,66.124
BOOT0: P10.1 R29.2 U3.60 | length 42.2
  Top Layer w0.254: P10.1@429.514,109.728 429.607,109.635 429.607,103.55 R29.2@430.571,102.586 ; U3.60@430.616,98.943 R29.2@430.616,102.575 ; P10.1@428.932,109.146 cw(c427.304,107.518) 429.607,107.518 ; P10.1@428.932,109.146 cw(c427.304,107.518) 429.607,107.518 ; P10.1@428.932,109.146 cw(c427.304,107.518) 429.607,107.518 ; P10.1@429.112,109.326 cw(c427.917,108.131) 429.607,108.131 ; P10.1@429.112,109.326 cw(c427.917,108.131) 429.607,108.131 ; P10.1@429.112,109.326 cw(c427.917,108.131) 429.607,108.131 ; P10.1@429.291,109.505 cw(c428.53,108.744) 429.607,108.744 ; P10.1@429.291,109.505 cw(c428.53,108.744) 429.607,108.744 ; P10.1@429.291,109.505 cw(c428.53,108.744) 429.607,108.744 ; 429.607,107.964 cw(c431.278,107.964) P10.1@430.096,109.146 ; 429.607,107.964 cw(c431.278,107.964) P10.1@430.096,109.146 ; 429.607,107.964 cw(c431.278,107.964) P10.1@430.096,109.146 ; 429.607,108.578 cw(c430.664,108.578) P10.1@429.916,109.326 ; 429.607,108.578 cw(c430.664,108.578) P10.1@429.916,109.326 ; 429.607,108.578 cw(c430.664,108.578) P10.1@429.916,109.326 ; 429.732,103.425 ccw(c430.787,104.48) R29.2@430.787,102.988 ; 429.732,103.425 ccw(c430.787,104.48) R29.2@430.787,102.988 ; 429.732,103.425 ccw(c430.787,104.48) R29.2@430.787,102.988 ; 430.166,102.991 ccw(c430.787,103.613) R29.2@430.787,102.734 ; 430.166,102.991 ccw(c430.787,103.613) R29.2@430.787,102.734 ; 430.166,102.991 ccw(c430.787,103.613) R29.2@430.787,102.734 ; R29.2@430.324,102.833 cw(c430.106,102.615) R29.2@430.414,102.615 ; R29.2@430.324,102.833 cw(c430.106,102.615) R29.2@430.414,102.615 ; R29.2@430.324,102.833 cw(c430.106,102.615) R29.2@430.414,102.615 ; R29.2@430.524,102.351 cw(c430.301,102.128) R29.2@430.616,102.128 ; R29.2@430.524,102.351 cw(c430.301,102.128) R29.2@430.616,102.128 ; R29.2@430.524,102.351 cw(c430.301,102.128) R29.2@430.616,102.128 ; 430.616,101.3 cw(c432.102,101.3) R29.2@431.051,102.351 ; 430.616,101.3 cw(c432.102,101.3) R29.2@431.051,102.351 ; 430.616,101.3 cw(c432.102,101.3) R29.2@431.051,102.351 ; 430.616,101.913 cw(c431.489,101.913) R29.2@430.872,102.53 ; 430.616,101.913 cw(c431.489,101.913) R29.2@430.872,102.53 ; 430.616,101.913 cw(c431.489,101.913) R29.2@430.872,102.53
BOOT1: R30.1 U3.28 | length 12.5
  Top Layer w0.254: R30.1@433.42,85.047 433.42,85.423 ; U3.28@434.116,87.543 434.116,86.119 ; R30.1@433.252,84.879 cw(c433.867,84.987) 433.426,85.429 ; R30.1@433.252,84.879 cw(c433.867,84.987) 433.426,85.429 ; R30.1@433.252,84.879 cw(c433.867,84.987) 433.426,85.429 ; R30.1@433.296,85.264 ccw(c433.257,85.423) 433.42,85.423 ; R30.1@433.296,85.264 ccw(c433.257,85.423) 433.42,85.423 ; R30.1@433.296,85.264 ccw(c433.257,85.423) 433.42,85.423 ; 433.42,85.423 ccw(c433.617,85.423) R30.1@433.537,85.243 ; 433.42,85.423 ccw(c433.617,85.423) R30.1@433.537,85.243 ; 433.42,85.423 ccw(c433.617,85.423) R30.1@433.537,85.243 ; 433.42,85.423 434.116,86.119 ; R30.1@433.502,84.923 cw(c434.454,85.091) 433.771,85.774 ; R30.1@433.502,84.923 cw(c434.454,85.091) 433.771,85.774 ; R30.1@433.502,84.923 cw(c434.454,85.091) 433.771,85.774 ; R30.1@433.753,84.967 cw(c435.04,85.194) 434.116,86.119 ; R30.1@433.753,84.967 cw(c435.04,85.194) 434.116,86.119 ; R30.1@433.753,84.967 cw(c435.04,85.194) 434.116,86.119
CHRG: R36.1 R39.2 U3.24 | length 28.9
  Top Layer w0.254: v1@432.116,85.438 U3.24@432.116,87.543 ; v1@436.88,77.611 R36.1@436.88,76.492 R39.2@438.61,76.492 ; v1@432.023,85.445 ccw(c431.799,85.669) 432.116,85.669 ; v1@432.023,85.445 ccw(c431.799,85.669) 432.116,85.669 ; v1@432.023,85.445 ccw(c431.799,85.669) 432.116,85.669 ; R36.1@436.687,76.685 ccw(c436.221,77.151) 436.88,77.151 ; R36.1@436.687,76.685 ccw(c436.221,77.151) 436.88,77.151 ; R36.1@436.687,76.685 ccw(c436.221,77.151) 436.88,77.151 ; v1@436.814,77.573 cw(c436.655,77.414) 436.88,77.414 ; v1@436.814,77.573 cw(c436.655,77.414) 436.88,77.414 ; v1@436.814,77.573 cw(c436.655,77.414) 436.88,77.414 ; 436.88,77.151 ccw(c437.539,77.151) R36.1@437.073,76.685 ; 436.88,77.151 ccw(c437.539,77.151) R36.1@437.073,76.685 ; 436.88,77.151 ccw(c437.539,77.151) R36.1@437.073,76.685 ; R36.1@437.073,76.299 cw(c437.539,75.833) 437.539,76.492 ; R36.1@437.073,76.299 cw(c437.539,75.833) 437.539,76.492 ; R36.1@437.073,76.299 cw(c437.539,75.833) 437.539,76.492 ; R36.1@437.073,76.685 ccw(c437.539,77.151) 437.539,76.492 ; R36.1@437.073,76.685 ccw(c437.539,77.151) 437.539,76.492 ; R36.1@437.073,76.685 ccw(c437.539,77.151) 437.539,76.492 ; 438.253,76.492 ccw(c438.253,77.151) R39.2@438.719,76.685 ; 438.253,76.492 cw(c438.253,75.833) R39.2@438.719,76.299 ; 438.253,76.492 ccw(c438.253,77.151) R39.2@438.719,76.685 ; 438.253,76.492 cw(c438.253,75.833) R39.2@438.719,76.299 ; 438.253,76.492 ccw(c438.253,77.151) R39.2@438.719,76.685 ; 438.253,76.492 cw(c438.253,75.833) R39.2@438.719,76.299
  Bottom Layer w0.254: v1@432.102,85.36 432.102,78.843 433.245,77.7 v1@436.798,77.7 ; v1@432.023,85.342 cw(c431.833,85.152) 432.102,85.152 ; v1@432.023,85.342 cw(c431.833,85.152) 432.102,85.152 ; v1@432.023,85.342 cw(c431.833,85.152) 432.102,85.152 ; 436.508,77.7 cw(c436.508,77.267) v1@436.814,77.573 ; 436.508,77.7 cw(c436.508,77.267) v1@436.814,77.573 ; 436.508,77.7 cw(c436.508,77.267) v1@436.814,77.573
  other v1: 436.866,77.624 432.075,85.394
CL_1: P6.3 R15.2 U3.35 | length 104.2
  Top Layer w0.254: P6.3@388.06,76.924 R15.2@392.684,76.924 393.306,76.302 393.306,71.332 v1@394.063,70.575 ; v1(427.428,70.185) v1@429.663,70.185 ; U3.35@438.066,90.493 439.762,90.493 440.065,90.19 v1@440.065,86.667 ; P6.3@387.827,76.485 cw(c388.886,75.426) 388.886,76.924 ; P6.3@387.827,76.485 cw(c388.886,75.426) 388.886,76.924 ; P6.3@387.827,76.485 cw(c388.886,75.426) 388.886,76.924 ; P6.3@388.006,76.306 cw(c389.499,74.813) 389.499,76.924 ; P6.3@388.006,76.306 cw(c389.499,74.813) 389.499,76.924 ; P6.3@388.006,76.306 cw(c389.499,74.813) 389.499,76.924 ; P6.3@388.186,76.126 cw(c390.112,74.2) 390.112,76.924 ; P6.3@388.186,76.126 cw(c390.112,74.2) 390.112,76.924 ; P6.3@388.186,76.126 cw(c390.112,74.2) 390.112,76.924 ; P6.3@388.186,77.29 ccw(c389.069,78.173) 389.069,76.924 ; P6.3@388.186,77.29 ccw(c389.069,78.173) 389.069,76.924 ; P6.3@388.186,77.29 ccw(c389.069,78.173) 389.069,76.924 ; 392.025,76.924 ccw(c392.025,77.583) R15.2@392.491,77.117 ; 392.025,76.924 cw(c392.025,76.265) R15.2@392.491,76.731 ; 392.025,76.924 ccw(c392.025,77.583) R15.2@392.491,77.117 ; 392.025,76.924 cw(c392.025,76.265) R15.2@392.491,76.731 ; 392.025,76.924 ccw(c392.025,77.583) R15.2@392.491,77.117 ; 392.025,76.924 cw(c392.025,76.265) R15.2@392.491,76.731 ; R15.2@392.684,76.651 cw(c392.684,75.992) 393.15,76.458 ; R15.2@392.684,76.651 cw(c392.684,75.992) 393.15,76.458 ; R15.2@392.684,76.651 cw(c392.684,75.992) 393.15,76.458 ; R15.2@392.957,76.924 ccw(c393.616,76.924) 393.15,76.458 ; R15.2@392.957,76.924 ccw(c393.616,76.924) 393.15,76.458 ; R15.2@392.957,76.924 ccw(c393.616,76.924) 393.15,76.458 ; 393.945,70.694 ccw(c394.149,70.898) v1@394.149,70.609 ; 393.945,70.694 ccw(c394.149,70.898) v1@394.149,70.609 ; 393.945,70.694 ccw(c394.149,70.898) v1@394.149,70.609 ; 429.469,70.185 cw(c429.469,69.967) v1@429.623,70.121 ; 429.469,70.185 cw(c429.469,69.967) v1@429.623,70.121 ; 429.469,70.185 cw(c429.469,69.967) v1@429.623,70.121
  Bottom Layer w0.254: v1@394.159,70.54 v1@427.385,70.195 ; v1(429.675,70.173) 439.157,70.173 440.058,71.074 440.058,71.289 ; 440.058,71.29 v1(440.058,86.626)
  other v1: 394.149,70.536
CL_2: P7.3 R18.2 U3.36 | length 49.2
  Top Layer w0.254: U3.36@438.066,90.993 439.861,90.993 440.643,90.211 440.643,87.561 v1@440.601,87.52 ; v1@440.837,80.913 441.303,80.447 442.585,80.447 442.976,80.839 R18.2@442.976,81.496 449.454,81.496 P7.3@449.489,81.461 ; 440.643,87.678 ccw(c440.891,87.678) v1@440.715,87.503 ; 440.643,87.678 ccw(c440.891,87.678) v1@440.715,87.503 ; 440.643,87.678 ccw(c440.891,87.678) v1@440.715,87.503 ; R18.2@442.783,81.303 cw(c442.321,80.839) 442.976,80.839 ; R18.2@442.783,81.303 cw(c442.321,80.839) 442.976,80.839 ; R18.2@442.783,81.303 cw(c442.321,80.839) 442.976,80.839 ; 442.976,80.839 cw(c443.631,80.839) R18.2@443.169,81.303 ; 442.976,80.839 cw(c443.631,80.839) R18.2@443.169,81.303 ; 442.976,80.839 cw(c443.631,80.839) R18.2@443.169,81.303 ; R18.2@443.169,81.303 cw(c443.635,80.837) 443.635,81.496 ; R18.2@443.169,81.303 cw(c443.635,80.837) 443.635,81.496 ; R18.2@443.169,81.303 cw(c443.635,80.837) 443.635,81.496 ; R18.2@443.169,81.689 ccw(c443.635,82.155) 443.635,81.496 ; R18.2@443.169,81.689 ccw(c443.635,82.155) 443.635,81.496 ; R18.2@443.169,81.689 ccw(c443.635,82.155) 443.635,81.496 ; 447.396,81.496 ccw(c447.396,84.48) P7.3@449.506,82.37 ; 447.396,81.496 ccw(c447.396,84.48) P7.3@449.506,82.37 ; 447.396,81.496 ccw(c447.396,84.48) P7.3@449.506,82.37 ; 448.009,81.496 ccw(c448.009,83.867) P7.3@449.686,82.19 ; 448.009,81.496 ccw(c448.009,83.867) P7.3@449.686,82.19 ; 448.009,81.496 ccw(c448.009,83.867) P7.3@449.686,82.19 ; 448.623,81.496 ccw(c448.623,83.253) P7.3@449.865,82.011 ; 448.623,81.496 ccw(c448.623,83.253) P7.3@449.865,82.011 ; 448.623,81.496 ccw(c448.623,83.253) P7.3@449.865,82.011 ; 448.806,81.496 cw(c448.806,80.506) P7.3@449.506,81.206 ; 448.806,81.496 cw(c448.806,80.506) P7.3@449.506,81.206 ; 448.806,81.496 cw(c448.806,80.506) P7.3@449.506,81.206
  Bottom Layer w0.254: v1(440.664,87.451) 440.664,81.158 v1@440.764,81.058 ; 440.664,81.459 ccw(c441.344,81.459) v1@440.863,80.978 ; 440.664,81.459 ccw(c441.344,81.459) v1@440.863,80.978 ; 440.664,81.459 ccw(c441.344,81.459) v1@440.863,80.978
  other v1: 440.811,80.926
DCMI_D0: J2.19 U3.37 | length 42.9
  Top Layer w0.254: v1@432.967,96.077 432.967,94.719 436.178,91.508 438.05,91.508 U3.37@438.066,91.493 ; v1@436.182,125.473 J2.19@436.182,127.822 ; v1@432.887,96.055 cw(c432.692,95.86) 432.967,95.86 ; v1@432.887,96.055 cw(c432.692,95.86) 432.967,95.86 ; v1@432.887,96.055 cw(c432.692,95.86) 432.967,95.86 ; 436.182,125.673 ccw(c436.406,125.673) v1@436.248,125.515 ; 436.182,125.673 ccw(c436.406,125.673) v1@436.248,125.515 ; 436.182,125.673 ccw(c436.406,125.673) v1@436.248,125.515
  Bottom Layer w0.254: v1(432.938,96.106) 432.938,100.726 436.622,104.41 436.622,125.008 v1@436.206,125.424 ; v1@436.269,125.463 ccw(c436.517,125.463) 436.342,125.288 ; v1@436.269,125.463 ccw(c436.517,125.463) 436.342,125.288 ; v1@436.269,125.463 ccw(c436.517,125.463) 436.342,125.288
  other v1: 436.196,125.463
DCMI_D1: J2.21 U3.38 | length 41.3
  Top Layer w0.254: v1@433.871,96.197 433.871,94.591 436.469,91.993 U3.38@438.066,91.993 ; J2.21@437.182,127.822 437.19,127.815 v1@437.19,124.325 ; v1@433.799,96.121 cw(c433.624,95.946) 433.871,95.946 ; v1@433.799,96.121 cw(c433.624,95.946) 433.871,95.946 ; v1@433.799,96.121 cw(c433.624,95.946) 433.871,95.946 ; v1@437.126,124.234 ccw(c436.973,124.387) 437.19,124.387 ; v1@437.126,124.234 ccw(c436.973,124.387) 437.19,124.387 ; v1@437.126,124.234 ccw(c436.973,124.387) 437.19,124.387
  Bottom Layer w0.254: v1(433.85,96.173) 433.85,100.86 437.168,104.177 v1@437.168,124.16 ; 437.168,123.981 cw(c437.379,123.981) v1@437.229,124.13 ; 437.168,123.981 cw(c437.379,123.981) v1@437.229,124.13 ; 437.168,123.981 cw(c437.379,123.981) v1@437.229,124.13
  other v1: 437.178,124.182
DCMI_D2: J2.22 U3.39 | length 39.2
  Top Layer w0.254: v1@434.726,96.181 434.726,94.527 436.76,92.493 U3.39@438.066,92.493 ; v1@437.682,125.155 J2.22@437.682,127.822 ; 437.682,125.321 ccw(c437.902,125.321) v1@437.747,125.166 ; 437.682,125.321 ccw(c437.902,125.321) v1@437.747,125.166 ; 437.682,125.321 ccw(c437.902,125.321) v1@437.747,125.166
  Bottom Layer w0.254: v1(434.72,96.14) 434.72,101.056 437.689,104.025 437.689,124.792 437.695,124.798 v1@437.695,125.063
  other v1: 437.695,125.114
DCMI_D3: J2.20 U3.40 | length 39.1
  Top Layer w0.254: v1@435.588,96.098 435.588,94.548 437.144,92.993 U3.40@438.066,92.993 ; v1@436.682,126.435 J2.20@436.682,127.822
  Bottom Layer w0.254: v1(435.58,96.123) 435.58,101.26 438.226,103.906 438.226,125.367 438.231,125.371 438.231,125.804 437.674,126.361 v1@436.775,126.361 ; v1@436.724,126.433 ccw(c436.898,126.607) 436.898,126.361 ; v1@436.724,126.433 ccw(c436.898,126.607) 436.898,126.361 ; v1@436.724,126.433 ccw(c436.898,126.607) 436.898,126.361
  other v1: 436.673,126.382
DCMI_D4: J2.18 U3.52 | length 30.5
  Top Layer w0.254: U3.52@434.625,99.089 v1@434.625,103.189 ; v1@435.682,126.281 J2.18@435.682,127.822 ; v1@435.616,126.424 ccw(c435.456,126.585) 435.682,126.585 ; v1@435.616,126.424 ccw(c435.456,126.585) 435.682,126.585 ; v1@435.616,126.424 ccw(c435.456,126.585) 435.682,126.585
  Bottom Layer w0.254: v1@434.752,103.245 434.752,103.35 436.116,104.713 436.116,124.538 435.674,124.979 435.674,125.055 435.676,125.056 435.676,126.28 v1@435.696,126.227 ; v1@434.693,103.203 cw(c434.903,103.203) 434.754,103.352 ; v1@434.693,103.203 cw(c434.903,103.203) 434.754,103.352 ; v1@434.693,103.203 cw(c434.903,103.203) 434.754,103.352
  other v1: 434.62,103.203 435.668,126.373
DCMI_D5: J2.16 U3.58 | length 32.1
  Top Layer w0.254: U3.58@431.616,98.943 v1@431.616,100.474 ; v1@434.655,124.798 J2.16@434.655,127.822 ; 431.616,100.311 cw(c431.829,100.311) v1@431.678,100.462 ; 431.616,100.311 cw(c431.829,100.311) v1@431.678,100.462 ; 431.616,100.311 cw(c431.829,100.311) v1@431.678,100.462 ; v1@434.587,124.785 ccw(c434.423,124.948) 434.655,124.948 ; v1@434.587,124.785 ccw(c434.423,124.948) 434.655,124.948 ; v1@434.587,124.785 ccw(c434.423,124.948) 434.655,124.948
  Bottom Layer w0.254: v1(431.627,100.513) 431.627,101.528 434.209,104.11 434.23,104.11 435.088,104.968 435.088,123.622 434.669,124.04 434.669,124.683 v1@434.649,124.703 ; v1@434.587,124.682 cw(c434.388,124.482) 434.669,124.482 ; v1@434.587,124.682 cw(c434.388,124.482) 434.669,124.482 ; v1@434.587,124.682 cw(c434.388,124.482) 434.669,124.482
  other v1: 434.639,124.733
DCMI_D6: J2.14 U3.61 | length 32.1
  Top Layer w0.254: U3.61@430.116,98.943 v1@430.116,101.334 ; v1@433.682,126.488 J2.14@433.682,127.822 ; v1@433.592,126.421 ccw(c433.375,126.638) 433.682,126.638 ; v1@433.592,126.421 ccw(c433.375,126.638) 433.682,126.638 ; v1@433.592,126.421 ccw(c433.375,126.638) 433.682,126.638
  Bottom Layer w0.254: v1(430.111,101.334) 430.111,101.393 434.126,105.408 434.126,122.959 433.644,123.441 v1@433.644,126.32 ; v1(433.644,126.369) v1@433.644,126.32 ; v1@433.66,126.304 v1@433.644,126.32 ; v1@430.184,101.334 cw(c430.502,101.334) 430.277,101.559 ; v1@430.184,101.334 cw(c430.502,101.334) 430.277,101.559 ; v1@430.184,101.334 cw(c430.502,101.334) 430.277,101.559
DCMI_D7: J2.12 U3.62 | length 31.9
  Top Layer w0.254: U3.62@429.616,98.943 v1@429.616,100.476 ; v1@432.682,126.498 J2.12@432.682,127.822 ; v1@429.53,100.527 cw(c429.322,100.32) 429.616,100.32 ; v1@429.53,100.527 cw(c429.322,100.32) 429.616,100.32 ; v1@429.53,100.527 cw(c429.322,100.32) 429.616,100.32 ; 432.682,126.576 ccw(c432.893,126.576) v1@432.744,126.427 ; 432.682,126.576 ccw(c432.893,126.576) v1@432.744,126.427 ; 432.682,126.576 ccw(c432.893,126.576) v1@432.744,126.427
  Bottom Layer w0.254: v1(429.581,100.579) 429.581,101.499 433.723,105.641 433.723,122.755 432.697,123.78 432.697,124.369 432.7,124.371 v1@432.7,126.209 ; v1@432.662,126.418 v1@432.699,126.446
  other v1: 432.693,126.375
DCMI_HREF: J2.9 U3.20 | length 43.9
  Top Layer w0.254: v1@429.782,88.728 429.877,88.728 430.116,88.49 U3.20@430.116,87.543 ; v1@431.182,126.259 J2.9@431.182,127.822 ; v1@431.112,126.351 ccw(c430.943,126.52) 431.182,126.52 ; v1@431.112,126.351 ccw(c430.943,126.52) 431.182,126.52 ; v1@431.112,126.351 ccw(c430.943,126.52) 431.182,126.52
  Bottom Layer w0.254: v1(429.809,88.809) 429.809,99.054 429.15,99.714 429.15,101.714 433.363,105.927 433.363,122.546 432.263,123.646 432.263,123.649 431.173,124.74 ; v1(431.164,126.299) 431.164,124.756 431.18,124.74
DCMI_PCLK: J2.17 U3.22 | length 44.9
  Top Layer w0.254: U3.22@431.116,87.543 v1@431.116,96.147 ; J2.17@435.182,127.822 435.182,125.254 435.185,125.252 435.185,124.518 v1@435.572,124.131 ; v1@431.053,96.111 cw(c430.901,95.959) 431.116,95.959 ; v1@431.053,96.111 cw(c430.901,95.959) 431.116,95.959 ; v1@431.053,96.111 cw(c430.901,95.959) 431.116,95.959 ; 435.305,124.398 cw(c435.058,124.151) v1@435.407,124.151 ; 435.305,124.398 cw(c435.058,124.151) v1@435.407,124.151 ; 435.305,124.398 cw(c435.058,124.151) v1@435.407,124.151
  Bottom Layer w0.254: v1@431.125,96.194 431.125,99.14 432.222,100.237 432.222,101.561 435.526,104.865 435.526,124.085 v1@435.48,124.131 ; v1@431.053,96.214 ccw(c430.878,96.389) 431.125,96.389 ; v1@431.053,96.214 ccw(c430.878,96.389) 431.125,96.389 ; v1@431.053,96.214 ccw(c430.878,96.389) 431.125,96.389 ; v1@435.429,124.1 cw(c435.193,123.865) 435.526,123.865 ; v1@435.429,124.1 cw(c435.193,123.865) 435.526,123.865 ; v1@435.429,124.1 cw(c435.193,123.865) 435.526,123.865
  other v1: 431.104,96.162 435.48,124.151
DCMI_PWDN: J2.8 U3.23 | length 48.3
  Top Layer w0.254: v1@428.912,96.648 431.436,96.648 431.621,96.463 U3.23@431.621,87.94 ; v1@430.305,125.852 430.305,126.348 430.682,126.726 J2.8@430.682,127.822 ; v1@428.914,96.762 ccw(c429.188,97.036) 429.188,96.648 ; v1@428.914,96.762 ccw(c429.188,97.036) 429.188,96.648 ; v1@428.914,96.762 ccw(c429.188,97.036) 429.188,96.648 ; v1@430.218,125.84 ccw(c430.007,126.051) 430.305,126.051 ; v1@430.218,125.84 ccw(c430.007,126.051) 430.305,126.051 ; v1@430.218,125.84 ccw(c430.007,126.051) 430.305,126.051
  Bottom Layer w0.254: v1@428.796,96.777 428.796,101.898 432.899,106.002 432.899,122.481 430.253,125.126 v1@430.253,125.7 ; 428.796,97.048 ccw(c429.2,97.048) v1@428.914,96.762 ; 428.796,97.048 ccw(c429.2,97.048) v1@428.914,96.762 ; 428.796,97.048 ccw(c429.2,97.048) v1@428.914,96.762 ; 430.253,125.575 cw(c430.483,125.575) v1@430.321,125.737 ; 430.253,125.575 cw(c430.483,125.575) v1@430.321,125.737 ; 430.253,125.575 cw(c430.483,125.575) v1@430.321,125.737
  other v1: 428.863,96.71 430.269,125.789